# Altium PCB ECB01-Kit-005.PcbDoc
Units mil, origin at the board's own origin, x right, y up, seen from the top; angles counter-clockwise.
Board outline 925.2 x 359.06 mil, 2 copper layers (Top Layer, Bottom Layer); 7 components, 7 nets, 24 pads, 19 vias.
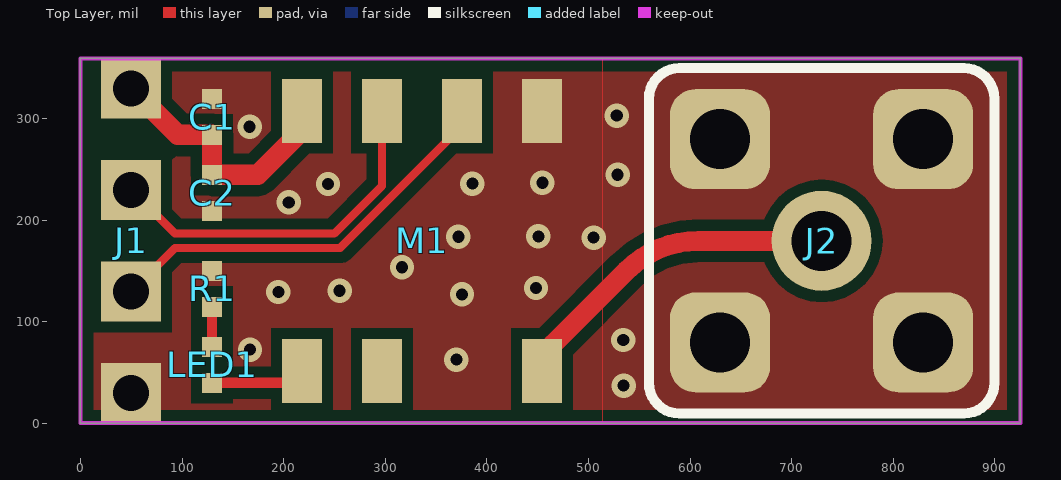
[diagram p0: Top Layer view]
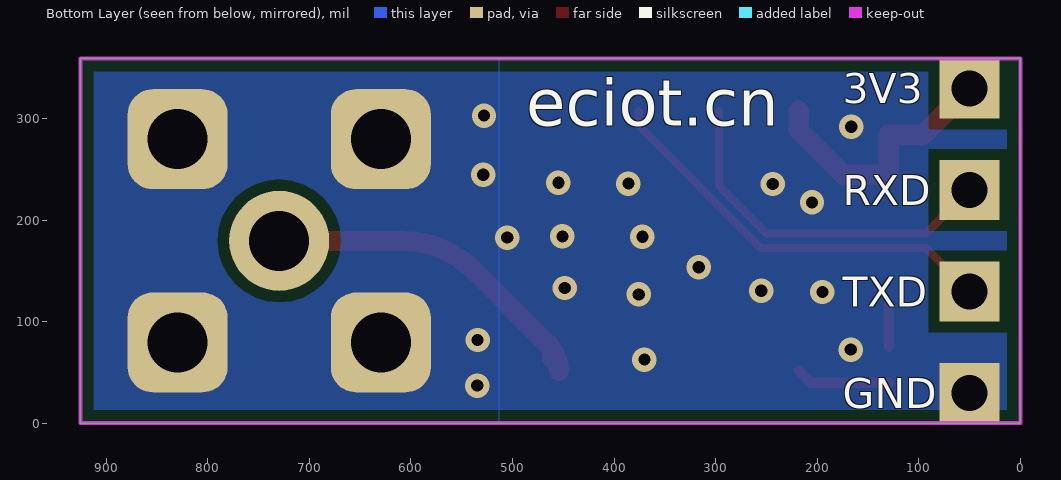
[diagram p1: Bottom Layer view, seen from below]

## Layer stack, top to bottom
Top Solder: solder mask 0.4, Solder Resist, Dk 3.5
Top Layer: signal copper 1.4
Dielectric 1: dielectric 12.6, FR-4, Dk 4.8
Bottom Layer: signal copper 1.4
Bottom Solder: solder mask 0.4, Solder Resist, Dk 3.5

## Board outline
0,0 0,359.06 925.2,359.06 925.2,0

## Design rules (kind name [scope] priority, off if disabled: settings)
Clearance [All] p1: gap=6 ignorepadtopadclearanceinfootprint=FALSE except(0: Arc-Hole Track-Hole SMDPad-Hole THPad-Hole Via-Hole Fill-Hole Poly-Hole Region-Hole Text-Hole)
PlaneConnect [All] p1: planeconnectstyle=Direct reliefexpansion=20 reliefentries=4 reliefconductorwidth=10 reliefairgap=10
PolygonConnect [All] p1: connectstyle=Direct reliefconductorwidth=10 reliefentries=4 polygonreliefangle="90 Angle" airgapwidth=10
RoutingVias [All] p1: holewidth=28 width=50 viastyle="Through Hole" minholewidth=28 minwidth=50 maxholewidth=28 maxwidth=50
SolderMaskExpansion [All] p1: expansion=4
Width [All] p1: maxlimit=100 minlimit=6 preferedwidth=10 minimp=50.000000 maximp=50.000000 favimp=50.000000
29 further rules are at their usual default settings.

## Components (designator, comment, footprint, x,y, rotation, side; value= is the part's Value field where it differs from the comment)
C1 "10uF" 0402 129.53,301.57 r270 top
C2 "100nF" 0402 129.53,226.77 r90 top
J1 "CON4" SIP04 50,179.53 r270 top
J2 "ANT" SMA 729.53,179.53 r90 top
LED1 "0402 蓝" 0402-led 129.53,57.48 r90 top
M1 "ECB01" ECB01 513.39,31.89 r270 top
R1 "2.2kΩ" 0402 129.53,132.28 r90 top

## Footprints (in the part's own frame and the unit in brackets; to place one, negate y for a bottom-side part, rotate by r counter-clockwise, add the part's x,y. Pads: shape width x height; smd on the part's side, far side on the other; paste and mask are expansions set on the pad)
0402 [mm]
  rect 0.5x0.5 smd paste+0: 1(-0.45,0) 2(0.45,0)
0402-led [mm]
  rect 0.5x0.5 smd paste+0: 1(-0.45,0) 2(0.45,0)
ECB01 [mm]
  rect 1.6x1 smd: 1(-7,-1.5) 2(-7,-3.5) 3(-7,-5.5) 4(-7,-7.5) 5(-0.5,-7.5) 6(-0.5,-5.5) 7(-0.5,-1.5)
SIP04 [mm]
  rect 1.5x1.5 hole 0.9: 1(-3.81,0) 2(-1.27,0) 3(1.27,0) 4(3.81,0)
SMA [mm]
  round 2.5 hole 1.5: 1(0,0)
  rrect50% 2.5x2.5 hole 1.5: 2(-2.54,-2.54) 2(-2.54,2.54) 2(2.54,-2.54) 2(2.54,2.54)
  silkscreen extent -4.32,-4.32 4.32,4.32, body extent -3.56,-11.61 3.44,3.49, height 3.24

## Part data
C1 C2: library part C, 封装=0402, 类型=电容
LED1: library part LED-0402, 封装=0402, 类型=LED
R1: library part R, 封装=0402, 类型=电阻

## Via types
v1: diameter 24, hole 12, Top Layer to Bottom Layer, tented both sides, 19 vias

## Nets (pads, with @x,y where several pads share a name; then routed paths per layer and width w, separated by ;. In a path a pad name is that pad's centre, name@x,y a point inside that pad or via, vN(x,y) a via of type N, cw(c..) or ccw(c..) an arc to the next point about the centre after c; other vN are vias at no path point)
+3.3V: C1.2 C2.2 J1.1 M1.4 | length 263.8
  Top Layer w20: J1.1 95.67,283.86 C1.2 C2.2 174.41,244.49 218.11,288.19 M1.4
GND: C1.1 C2.1 J1.4 J2.2 M1.1 R1.2
  other v1: 534.65,37.01 370.08,62.6 166.93,72.44 534.25,81.89 375.59,126.77 194.88,129.13 255.12,130.32 448.43,133.07 316.54,153.54 505.12,182.68 372.05,183.46 450.79,183.86 205.12,217.32 243.7,235.43 385.83,235.83 454.72,236.61 528.74,244.49 166.54,291.73 527.95,302.76
NetJ2_1: J2.1 M1.7 | length 333.5
  Top Layer w19.68: M1.7 cw(c491.4,51.57) 465.19,77.79 537.64,150.24 cw(c608.35,79.53) 608.35,179.53 J2.1 ; M1.7@459.62,64.34 ccw(c459.62,67.2) M1.7@461.63,65.17
NetLED1_1: LED1.1 M1.5 | length 93.5
  Top Layer w10: LED1.1 206.3,39.76 M1.5
NetLED1_2: LED1.2 R1.1 | length 39.4
  Top Layer w10: LED1.2 R1.1
RXD: J1.2 M1.3 | length 358
  Top Layer w8: J1.2 92.91,186.61 249.89,186.61 296.85,233.58 M1.3
TXD: J1.3 M1.2 | length 408.1
  Top Layer w8: J1.3 93.09,172.61 255.69,172.61 375.59,292.52 M1.2
pads on no net: M1.6

## Polygon pours and split planes (outlines as drawn)
GND on Bottom Layer (solid, remove dead copper, pour order 25): 0,359.06 0,0 925.2,0 925.2,359.06 0,359.06
no net on Bottom Layer "Bottom Layer-No Net" (solid, pour order 11): -1.97,-2.36
GND on Bottom Layer "Bottom Layer-GND" (solid, remove dead copper, pour order 2): 0,359.06 513.39,359.06 513.39,0 0,0
GND on Top Layer (solid, remove dead copper, pour order 23): 0,359.06 0,0 925.2,0 925.2,359.06 0,359.06
no net on Top Layer (solid, pour order 21): 1.18,359.06
GND on Top Layer (solid, remove dead copper, pour order 19): 0,0 0,359.06 925.2,359.06 925.2,0
GND on Top Layer "Top Layer-GND" (solid, remove dead copper, pour order 0): 0,359.06 513.39,359.06 513.39,0 0,0
no net on Top Layer "Top Layer-No Net" (solid, pour order 4): 0,359.06

## Keep-outs
Keep-Out Layer:
  the board outline again, w3.94

## Silkscreen, mask and mechanical layers (free items; w line width, h text height)
Bottom Overlay:
  text "3V3" at 174.8,314.76 h29.53
  text "eciot.cn" at 486.22,277.56 h78.74
  text "RXD" at 174.8,214.76 h29.53
  text "TXD" at 174.8,114.76 h29.53
  text "GND" at 174.8,14.76 h29.53

## Text inside footprints (layer, text, board x,y; h text height)
LED1: Mechanical 1 "+" at 133.46,31.1 h7.87 r90